# Altium PCB Tigershark 3D.PcbDoc (part 2 of 3)
Units mil, origin at the board's own origin, x right, y up, seen from the top; angles counter-clockwise.
Board outline 6000 x 4000 mil, 4 copper layers (Top Layer, Groun Plane, Power Plane, Bottom Layer); 251 components, 259 nets, 1002 pads, 1752 vias.
Unrouted connection lines stored in the file: 937.
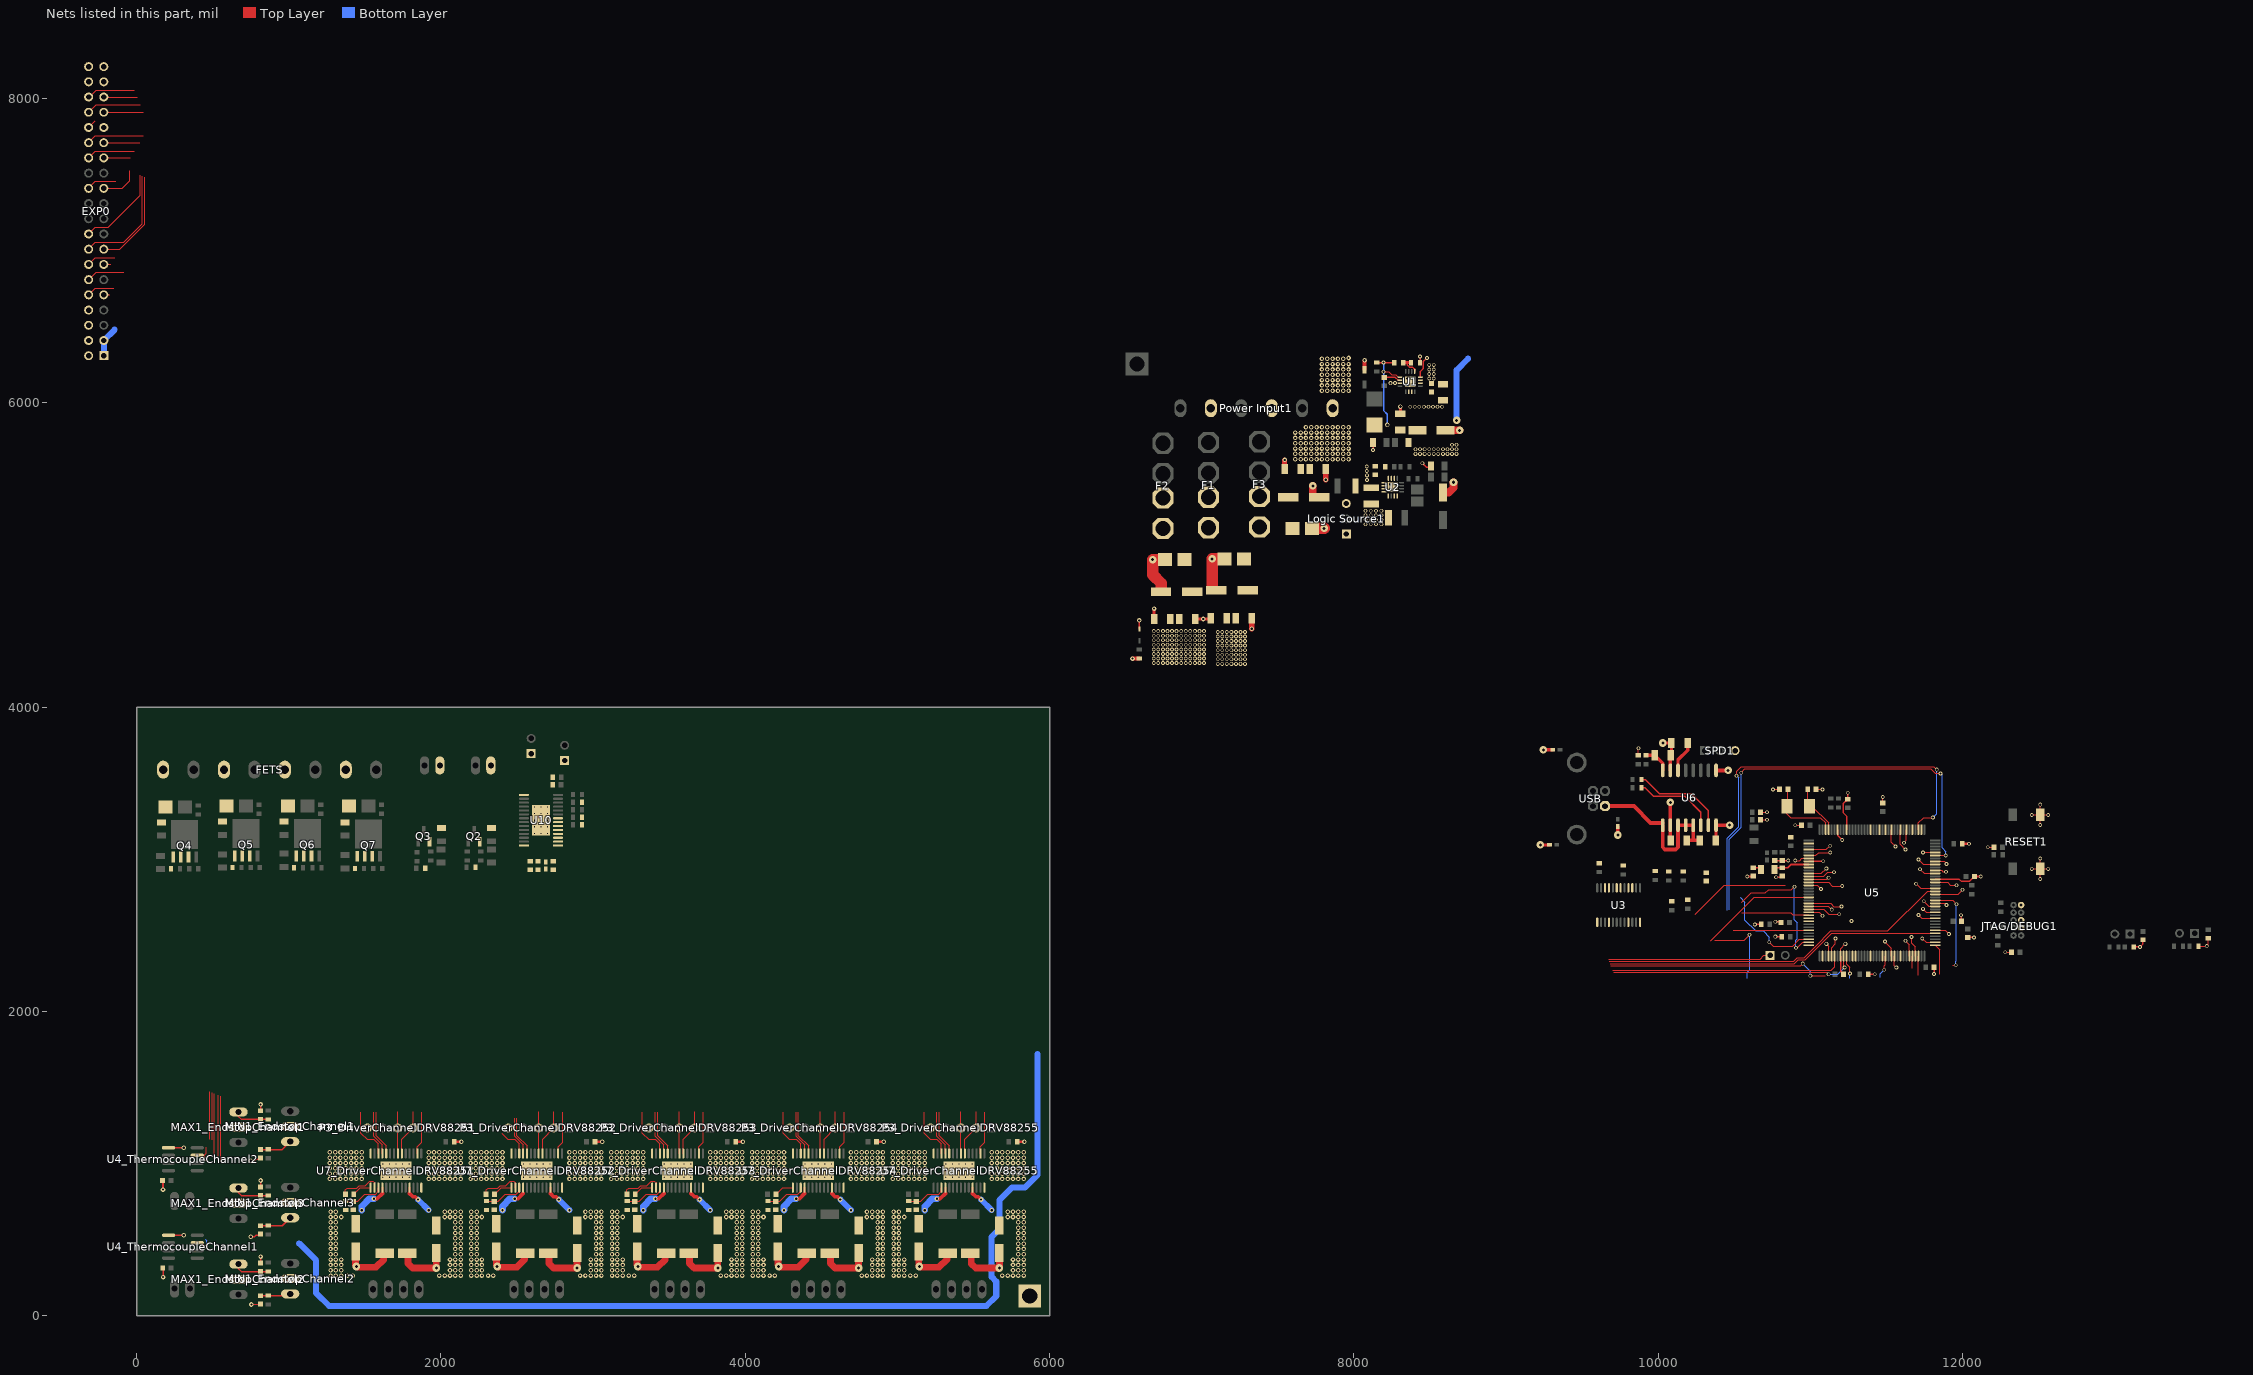
[diagram p4: the nets of this part, all layers, seen from the top]

## Via types
v1: diameter 30, hole 15, Top Layer to Bottom Layer, 1261 vias
v2: diameter 25, hole 15, Top Layer to Bottom Layer, 375 vias
v3: diameter 19.68, hole 7.87, Top Layer to Bottom Layer, 90 vias
v4: diameter 50, hole 20, Top Layer to Bottom Layer, 24 vias
v5: diameter 30, hole 20, Top Layer to Bottom Layer, 2 vias

## Nets (pads, with @x,y where several pads share a name; then routed paths per layer and width w, separated by ;. In a path a pad name is that pad's centre, name@x,y a point inside that pad or via, vN(x,y) a via of type N, cw(c..) or ccw(c..) an arc to the next point about the centre after c; other vN are vias at no path point) (continued)
+5VCC: "Logic Source1.3" C8.2 C9.1 EXP0.1 EXP0.3 L1.2 R7.2 R8.2 R9.1 U1.9 | length 7981
  Top Layer w8: v2(8195,6205) 8230,6205 8250,6185 8276.21,6185 8291.69,6169.53 U1.9@8303.07,6169.53
  Top Layer w10: R9.1@8145.47,6265 v2(8195,6265) R7.2@8270.47,6265
  Bottom Layer w10: v2(8195,6265) 8195,5950 8220,5925 v5(8220,5855)
  Bottom Layer w40: EXP0.1@-215,6310 EXP0.3@-215,6410 -144,6481 ; 1069,476 1180,365 1180,150 1265,65 5585,65 5650,130 5650,225 5619,256 5619,519 5670,570 5670,760 5755,845 5840,845 5920,925 5920,1720 ; v4@8675,5890 8675,6215 8750,6290
  other v2: 8405,5665 8435,5665 8465,5665 8495,5665 8525,5665 8555,5665 8585,5665 8615,5665 8645,5665 8675,5665 8405,5695 8435,5695 8465,5695 8495,5695 8525,5695 8555,5695 8585,5695 8615,5695 8645,5695 8675,5695 8645,5725 8675,5725
  other v4: 8675,5885
+12VCC1: C10.2 C11.2 C16.1 C18.2 C19.2 C66_DriverChannelDRV88251.1 C66_DriverChannelDRV88252.1 C66_DriverChannelDRV88253.1 C66_DriverChannelDRV88254.1 C66_DriverChannelDRV88255.1 C69_DriverChannelDRV88251.1 C69_DriverChannelDRV88252.1 C69_DriverChannelDRV88253.1 C69_DriverChannelDRV88254.1 C69_DriverChannelDRV88255.1 C70_DriverChannelDRV88251.1 C70_DriverChannelDRV88252.1 C70_DriverChannelDRV88253.1 C70_DriverChannelDRV88254.1 C70_DriverChannelDRV88255.1 D8.2 F3.2 R30_DriverChannelDRV88251.1 R30_DriverChannelDRV88252.1 R30_DriverChannelDRV88253.1 R30_DriverChannelDRV88254.1 R30_DriverChannelDRV88255.1 R31.2 U1.2 U1.3 U1.11 U7_DriverChannelDRV88251.4 U7_DriverChannelDRV88251.11 U7_DriverChannelDRV88252.4 U7_DriverChannelDRV88252.11 U7_DriverChannelDRV88253.4 U7_DriverChannelDRV88253.11 U7_DriverChannelDRV88254.4 U7_DriverChannelDRV88254.11 U7_DriverChannelDRV88255.4 U7_DriverChannelDRV88255.11 | length 2214.5
  Top Layer w14: 1615.43,804.43 U7_DriverChannelDRV88251.4@1615.43,842.8 ; 1794.57,804.43 U7_DriverChannelDRV88251.11@1794.57,842.8 ; 2540.43,804.43 U7_DriverChannelDRV88252.4@2540.43,842.8 ; 2719.57,804.43 U7_DriverChannelDRV88252.11@2719.57,842.8 ; 3465.43,804.43 U7_DriverChannelDRV88253.4@3465.43,842.8 ; 3644.57,804.43 U7_DriverChannelDRV88253.11@3644.57,842.8 ; 4390.43,804.43 U7_DriverChannelDRV88254.4@4390.43,842.8 ; 4569.57,804.43 U7_DriverChannelDRV88254.11@4569.57,842.8 ; 5315.43,804.43 U7_DriverChannelDRV88255.4@5315.43,842.8 ; 5494.57,804.43 U7_DriverChannelDRV88255.11@5494.57,842.8
  Top Layer w25: v1(1560,770) 1581,770 1615.43,804.43 ; 1794.57,804.43 1816,783 1832,783 v1(1850,765) ; v1(2485,770) 2506,770 2540.43,804.43 ; 2719.57,804.43 2741,783 2757,783 v1(2775,765) ; v1(3410,770) 3431,770 3465.43,804.43 ; 3644.57,804.43 3666,783 3682,783 v1(3700,765) ; v1(4335,770) 4356,770 4390.43,804.43 ; 4569.57,804.43 4591,783 4607,783 v1(4625,765) ; v1(5260,770) 5281,770 5315.43,804.43 ; 5494.57,804.43 5516,783 5532,783 v1(5550,765)
  Bottom Layer w39: v1(1850,765) v1(1920,695) ; v1(2775,765) v1(2845,695) ; v1(3700,765) v1(3770,695) ; v1(4625,765) v1(4695,695) ; v1(5550,765) v1(5620,695)
  Bottom Layer w45: v1(1480,695) 1480,720 1530,770 v1(1560,770) ; v1(2405,695) 2405,720 2455,770 v1(2485,770) ; v1(3330,695) 3330,720 3380,770 v1(3410,770) ; v1(4255,695) 4255,720 4305,770 v1(4335,770) ; v1(5180,695) 5180,720 5230,770 v1(5260,770)
  other v1: 1275,265 1310,265 1345,265 1385,265 1420,265 1990,265 2025,265 2060,265 2095,265 2130,265 2200,265 2235,265 2270,265 2310,265 2345,265 2915,265 2915,265 2950,265 2950,265 2985,265 2985,265 3020,265 3020,265 3055,265 3055,265 3125,265 3160,265 3195,265 3235,265 3270,265 3840,265 3875,265 3910,265 3945,265 3980,265 4050,265 4085,265 4120,265 4160,265 4195,265 4765,265 4800,265 4835,265 4870,265 4905,265 4975,265 5010,265 5045,265 5085,265 5120,265 5690,265 5725,265 5760,265 5795,265 5830,265 1275,300 1310,300 1345,300 2060,300 2095,300 2130,300 2200,300 2235,300 2235,300 2270,300 2985,300 2985,300 3020,300 3020,300 3055,300 3055,300 3125,300 3160,300 3195,300 3910,300 3945,300 3980,300 4050,300 4085,300 4120,300 4835,300 4870,300 4905,300 4975,300 5010,300 5045,300 5760,300 5795,300 5830,300 1275,335 1310,335 1345,335 2060,335 2095,335 2130,335 2200,335 2235,335 2270,335 2985,335 3020,335 3055,335 3055,335 3125,335 3160,335 3195,335 3910,335 3945,335 3980,335 4050,335 4085,335 4120,335 4835,335 4870,335 4905,335 4975,335 5010,335 5045,335 5760,335 5795,335 5830,335 1275,370 1310,370 1345,370 2060,370 2095,370 2130,370 2200,370 2200,370 2235,370 2235,370 2270,370 2985,370 2985,370 3020,370 3020,370 3055,370 3055,370 3125,370 3160,370 3195,370 3910,370 3945,370 3980,370 4050,370 4085,370 4120,370 4835,370 4870,370 4905,370 4975,370 5010,370 5045,370 5760,370 5795,370 5830,370 1275,405 1310,405 2095,405 2130,405 2200,405 2200,405 2200,405 2200,405 2200,405 2235,405 2235,405 3020,405 3020,405 3055,405 3055,405 3125,405 3125,405 3160,405 3945,405 3980,405 4050,405 4050,405 4085,405 4870,405 4905,405 4975,405 4975,405 5010,405 5795,405 5830,405 1275,440 1310,440 2095,440 2130,440 2200,440 2200,440 2200,440 2200,440 2200,440 2235,440 2235,440 3020,440 3020,440 3055,440 3055,440 3125,440 3125,440 3160,440 3945,440 3980,440 4050,440 4050,440 4085,440 4870,440 4905,440 4975,440 4975,440 5010,440 5795,440 5830,440 1275,475 1310,475 2095,475 2130,475 2200,475 2200,475 2200,475 2200,475 2200,475 2235,475 2235,475 3020,475 3020,475 3055,475 3055,475 3125,475 3125,475 3160,475 3945,475 3980,475 4050,475 4050,475 4085,475 4870,475 4905,475 4975,475 4975,475 5010,475 5795,475 5830,475 1275,510 1310,510 2095,510 2130,510 2200,510 2200,510 2200,510 2200,510 2200,510 2235,510 2235,510 3020,510 3020,510 3055,510 3055,510 3125,510 3125,510 3160,510 3945,510 3980,510 4050,510 4050,510 4085,510 4870,510 4905,510 4975,510 4975,510 5010,510 5795,510 5830,510 1275,545 1310,545 2095,545 2130,545 2200,545 2200,545 2200,545 2200,545 2200,545 2235,545 2235,545 3020,545 3020,545 3055,545 3055,545 3125,545 3125,545 3160,545 3945,545 3980,545 4050,545 4050,545 4085,545 4870,545 4905,545 4975,545 4975,545 5010,545 5795,545 5830,545 1275,580 1310,580 2095,580 2130,580 2200,580 2200,580 2200,580 2200,580 2200,580 2235,580 2235,580 3020,580 3020,580 3055,580 3055,580 3125,580 3125,580 3160,580 3945,580 3980,580 4050,580 4050,580 4085,580 4870,580 4905,580 4975,580 4975,580 5010,580 5795,580 5830,580 1275,615 1310,615 2095,615 2130,615 2200,615 2200,615 2235,615 2235,615 3020,615 3020,615 3055,615 3055,615 3125,615 3160,615 3945,615 3980,615 4050,615 4085,615 4870,615 4905,615 4975,615 5010,615 5795,615 5830,615 1275,650 1310,650 1345,650 2025,650 2060,650 2095,650 2130,650 2200,650 2200,650 2235,650 2235,650 2270,650 2270,650 2950,650 2950,650 2985,650 2985,650 3020,650 3020,650 3055,650 3055,650 3125,650 3160,650 3195,650 3875,650 3910,650 3945,650 3980,650 4050,650 4085,650 4120,650 4800,650 4835,650 4870,650 4905,650 4975,650 5010,650 5045,650 5725,650 5760,650 5795,650 5830,650 1275,685 1310,685 2025,685 2060,685 2095,685 2130,685 2200,685 2200,685 2235,685 2235,685 2950,685 2950,685 2985,685 2985,685 3020,685 3020,685 3055,685 3055,685 3125,685 3160,685 3875,685 3910,685 3945,685 3980,685 4050,685 4085,685 4800,685 4835,685 4870,685 4905,685 4975,685 5010,685 5725,685 5760,685 5795,685 5830,685 7615,5630 7650,5630 7685,5630 7720,5630 7755,5630 7790,5630 7825,5630 7860,5630 7895,5630 7930,5630 7965,5630 7615,5665 7650,5665 7685,5665 7720,5665 7755,5665 7790,5665 7825,5665 7860,5665 7895,5665 7930,5665 7965,5665 7615,5700 7650,5700 7685,5700 7720,5700 7755,5700 7790,5700 7825,5700 7860,5700 7895,5700 7930,5700 7965,5700 7615,5735 7650,5735 7685,5735 7720,5735 7755,5735 7790,5735 7825,5735 7860,5735 7895,5735 7930,5735 7965,5735 7615,5770 7650,5770 7685,5770 7720,5770 7755,5770 7790,5770 7825,5770 7860,5770 7895,5770 7930,5770 7965,5770 7615,5805 7650,5805 7685,5805 7720,5805 7755,5805 7790,5805 7825,5805 7860,5805 7895,5805 7930,5805 7965,5805 7685,5840 7720,5840 7755,5840 7790,5840 7825,5840 7860,5840 7895,5840 7930,5840 7965,5840 7790,6080 7825,6080 7860,6080 7895,6080 7930,6080 7965,6080 7790,6115 7825,6115 7860,6115 7895,6115 7930,6115 7965,6115 7790,6150 7825,6150 7860,6150 7895,6150 7930,6150 7965,6150 7790,6185 7825,6185 7860,6185 7895,6185 7930,6185 7965,6185 7790,6220 7825,6220 7860,6220 7895,6220 7930,6220 7965,6220 7790,6255 7825,6255 7860,6255 7895,6255 7930,6255 7965,6255 7790,6290 7825,6290 7860,6290 7895,6290 7930,6290 7965,6295
  other v2: 8240,6130 8270,6130.16 8495,6160 8525,6160 8495,6190 8525,6190 8495,6220 8525,6220 8495,6250 8525,6250
+12VCC2: C3.1 C5.2 C6.2 D4.2 D12.2 D15.2 D17.2 D19.2 F2.2 FAN-1.1 FAN-2.1 FETS.1 FETS.3 FETS.5 FETS.7 R1.2 R13.1 R47.1 R56.2 R60.2 R64.2 R68.2 U10.1 | length 45.2
  Top Layer w8: R1.2@6589.53,4320 R1.2@6590,4320.47
  Top Layer w25: v1(6545,4320) R1.2@6589.53,4320
  other v2: 6685,4290 6715,4290 6745,4290 6775,4290 6805,4290 6835,4290 6865,4290 6895,4290 6925,4290 6955,4290 6985,4290 7015,4290 6685,4320 6715,4320 6745,4320 6775,4320 6805,4320 6835,4320 6865,4320 6895,4320 6925,4320 6955,4320 6985,4320 7015,4320 6685,4350 6715,4350 6745,4350 6775,4350 6805,4350 6835,4350 6865,4350 6895,4350 6925,4350 6955,4350 6985,4350 7015,4350 6685,4380 6715,4380 6745,4380 6775,4380 6805,4380 6835,4380 6865,4380 6895,4380 6925,4380 6955,4380 6985,4380 7015,4380 6685,4410 6715,4410 6745,4410 6775,4410 6805,4410 6835,4410 6865,4410 6895,4410 6925,4410 6955,4410 6985,4410 7015,4410 6685,4440 6715,4440 6745,4440 6775,4440 6805,4440 6835,4440 6865,4440 6895,4440 6925,4440 6955,4440 6985,4440 7015,4440 6685,4470 6715,4470 6745,4470 6775,4470 6805,4470 6835,4470 6865,4470 6895,4470 6925,4470 6955,4470 6985,4470 7015,4470 6685,4500 6715,4500 6745,4500 6775,4500 6805,4500 6835,4500 6865,4500 6895,4500 6925,4500 6955,4500 6985,4500 7015,4500
+12VCC3: C12.1 C14.2 C15.2 D6.2 F1.2
  other v2: 7105,4285 7135,4285 7165,4285 7195,4285 7225,4285 7255,4285 7285,4285 7105,4315 7135,4315 7165,4315 7195,4315 7225,4315 7255,4315 7285,4315 7105,4345 7135,4345 7165,4345 7195,4345 7225,4345 7255,4345 7285,4345 7105,4375 7135,4375 7165,4375 7195,4375 7225,4375 7255,4375 7285,4375 7105,4405 7135,4405 7165,4405 7195,4405 7225,4405 7255,4405 7285,4405 7105,4435 7135,4435 7165,4435 7195,4435 7225,4435 7255,4435 7285,4435 7105,4465 7135,4465 7165,4465 7195,4465 7225,4465 7255,4465 7285,4465 7105,4495 7135,4495 7165,4495 7195,4495 7225,4495 7255,4495 7285,4495
ADC_TRIGGER: U5.36
ATSAM_SS: U5.64
AVDD3.3: C64.2 FB9.1 | length 56.9
  Top Layer w12: C64.2@10625,2945.12 10664.13,2945.12 FB9.1@10676.69,2932.56
AVREF: C65.2 FB9.2 U5.9 | length 240.6
  Top Layer w12: FB9.2@10763.31,2932.56 10775.87,2945.12 C65.2@10815,2945.12 10852.56,2945.12 10874.45,2967.01 U5.9@10989.65,2967.01
BED_PWM: R44.2 U10.17
BST: C7.2 U1.10 | length 110.4
  Top Layer w10: C7.2@8200,6167.56 8271.7,6167.56 8289.41,6149.84 U1.10@8303.07,6149.84
DIR: P3_DriverChannelDRV88251.2 P3_DriverChannelDRV88252.2 P3_DriverChannelDRV88253.2 P3_DriverChannelDRV88254.2 P3_DriverChannelDRV88255.2 U7_DriverChannelDRV88251.20 U7_DriverChannelDRV88252.20 U7_DriverChannelDRV88253.20 U7_DriverChannelDRV88254.20 U7_DriverChannelDRV88255.20 | length 1530
  Top Layer w8: U7_DriverChannelDRV88251.20@1743.39,1067.2 1743.39,1160.89 P3_DriverChannelDRV88251.2@1817.5,1235 1817.5,1342.5 ; U7_DriverChannelDRV88252.20@2668.39,1067.2 2668.39,1160.89 P3_DriverChannelDRV88252.2@2742.5,1235 2742.5,1342.5 ; U7_DriverChannelDRV88253.20@3593.39,1067.2 3593.39,1160.89 P3_DriverChannelDRV88253.2@3667.5,1235 3667.5,1342.5 ; U7_DriverChannelDRV88254.20@4518.39,1067.2 4518.39,1160.89 P3_DriverChannelDRV88254.2@4592.5,1235 4592.5,1342.5 ; U7_DriverChannelDRV88255.20@5443.39,1067.2 5443.39,1160.89 P3_DriverChannelDRV88255.2@5517.5,1235 5517.5,1342.5
DIR1: U5.113
DIR2: U5.110
DIR3: U5.101 | length 81.6
  Top Layer w8: U5.101@11820.35,2986.69 11878.31,2986.69 v2(11895,2970)
DIR4: U5.98 | length 74.5
  Top Layer w8: U5.98@11820.35,2927.64 11862.36,2927.64 11871.18,2918.82 v2(11891.18,2918.82)
DIR5: U5.92 | length 138
  Top Layer w8: v2(11695,2840) 11725.47,2809.53 U5.92@11820.35,2809.53
DIR_EXP1: EXP0.27 U5.59 | length 327.6
  Top Layer w8: EXP0.27@-215,7610 -40.6,7610 ; v2(11485,2275) 11485,2300 11493.58,2308.58 U5.59@11493.58,2364.65
  Bottom Layer w8: 11458.94,2225.76 11458.94,2248.94 v2(11485,2275)
DIR_EXP2: EXP0.28 U5.26 | length 765.2
  Top Layer w8: EXP0.28@-315,7610 -270,7655 -15.4,7655 ; 10550,2650 10870,2650 10885,2635 10987.01,2635 U5.26@10989.65,2632.36
DM_N: R18.1 U6.6 | length 541.9
  Top Layer w10: R18.1@9889.53,3470 9915,3470 9971,3414 10176,3414 10280,3310 U6.6@10280,3224.88
DP_P: R20.1 U6.7 | length 620.5
  Top Layer w10: R20.1@9889.53,3525 9915,3525 10010,3430 10220,3430 10330,3320 U6.7@10330,3224.88
DRV_RESET: U7_DriverChannelDRV88251.16 U7_DriverChannelDRV88252.16 U7_DriverChannelDRV88253.16 U7_DriverChannelDRV88254.16 U7_DriverChannelDRV88255.16 | length 1424.6
  Top Layer w8: U7_DriverChannelDRV88251.16@1845.75,1067.2 1845.75,1110.75 1875,1140 1875,1340 ; U7_DriverChannelDRV88252.16@2770.75,1067.2 2770.75,1110.75 2800,1140 2800,1340 ; U7_DriverChannelDRV88253.16@3695.75,1067.2 3695.75,1110.75 3725,1140 3725,1340 ; U7_DriverChannelDRV88254.16@4620.75,1067.2 4620.75,1110.75 4650,1140 4650,1340 ; U7_DriverChannelDRV88255.16@5545.75,1067.2 5545.75,1110.75 5575,1140 5575,1340
DRV_RESET1: U5.82 | length 119.6
  Top Layer w8: v2(11710,2635) 11732.32,2612.68 U5.82@11820.35,2612.68
DRV_RESET2: U5.86 | length 89.3
  Top Layer w8: v2(11745,2725) 11778.58,2691.42 U5.86@11820.35,2691.42
DRV_RESET3: U5.90 | length 192
  Top Layer w8: U5.90@11820.35,2770.16 11970.16,2770.16 v2(12000,2800)
DRV_RESET4: U5.94 | length 147.5
  Top Layer w8: U5.94@11820.35,2848.9 11901.1,2848.9 11920,2830 v2(11960,2830)
DRV_RESET5: U5.97 | length 111.6
  Top Layer w8: v2(11720,2935) 11747.05,2907.95 U5.97@11820.35,2907.95
DRV_RESET_EXP1: EXP0.35 U5.88 | length 792.4
  Top Layer w8: EXP0.35@-215,8010 5,8010 ; U5.88@11820.35,2730.79 11934.21,2730.79 v2(11960,2705) ; 11935,2305 v2(11955,2305)
  Bottom Layer w8: v2(11955,2305) 11955,2330 11960,2335 v2(11960,2705)
DRV_RESET_EXP2: EXP0.36 U5.2 | length 989.2
  Top Layer w8: EXP0.36@-315,8010 -310,8010 -265,8055 -15,8055 ; 10243.18,2640 10433.18,2830 10835,2830
EN: P3_DriverChannelDRV88251.3 P3_DriverChannelDRV88252.3 P3_DriverChannelDRV88253.3 P3_DriverChannelDRV88254.3 P3_DriverChannelDRV88255.3 U7_DriverChannelDRV88251.21 U7_DriverChannelDRV88252.21 U7_DriverChannelDRV88253.21 U7_DriverChannelDRV88254.21 U7_DriverChannelDRV88255.21 | length 1376.5
  Top Layer w8: P3_DriverChannelDRV88251.3@1717.5,1235 1717.5,1342.5 ; U7_DriverChannelDRV88251.21@1717.8,1067.2 P3_DriverChannelDRV88251.3@1717.8,1235 ; P3_DriverChannelDRV88252.3@2642.5,1235 2642.5,1342.5 ; U7_DriverChannelDRV88252.21@2642.8,1067.2 P3_DriverChannelDRV88252.3@2642.8,1235 ; P3_DriverChannelDRV88253.3@3567.5,1235 3567.5,1342.5 ; U7_DriverChannelDRV88253.21@3567.8,1067.2 P3_DriverChannelDRV88253.3@3567.8,1235 ; P3_DriverChannelDRV88254.3@4492.5,1235 4492.5,1342.5 ; U7_DriverChannelDRV88254.21@4492.8,1067.2 P3_DriverChannelDRV88254.3@4492.8,1235 ; P3_DriverChannelDRV88255.3@5417.5,1235 5417.5,1342.5 ; U7_DriverChannelDRV88255.21@5417.8,1067.2 P3_DriverChannelDRV88255.3@5417.8,1235
EN1: U5.12 | length 128.6
  Top Layer w8: U5.12@10989.65,2907.95 11072.95,2907.95 v2(11105,2940)
EN2: U5.13 | length 176.4
  Top Layer w8: U5.13@10989.65,2888.27 11088.27,2888.27 11115,2915 v2(11155,2915)
EN3: U5.14 | length 135.1
  Top Layer w8: U5.14@10989.65,2868.58 11108.58,2868.58 v2(11120,2880)
EN4: U5.15 | length 230.3
  Top Layer w8: U5.15@10989.65,2848.9 11121.1,2848.9 11145,2825 v2(11210,2825)
EN5: U5.16 | length 90.4
  Top Layer w8: U5.16@10989.65,2829.21 11045.79,2829.21 v2(11070,2805)
EN_EXP1: EXP0.23 U5.46 | length 945.3
  Top Layer w8: EXP0.23@-215,7410 -95,7410 -45,7460 -45,7525 ; 10370,2470 10565,2470 v2(10600,2505) ; U5.46@11237.68,2364.65 11237.68,2312.32 11260,2290 v2(11260,2250)
  Bottom Layer w8: 10585,2220 10585,2260 10600,2275 v2(10600,2505) ; 11260,2220 v2(11260,2250)
EN_EXP2: EXP0.24 U5.20 | length 962.9
  Top Layer w8: EXP0.24@-315,7410 -270,7455 -135,7455 ; 10344,2464 10630.47,2750.47 U5.20@10989.65,2750.47
ERASE: U5.87 | length 79.2
  Top Layer w8: U5.87@11820.35,2711.1 11883.9,2711.1 v2(11895,2700)
EXP_CS: EXP0.9 U5.45 | length 2087
  Top Layer w8: EXP0.9@-215,6710 -175,6710 ; 552,1017 552,1444.01 ; 9706.99,2259 11106,2259 v2(11120,2245) ; U5.45@11217.99,2364.65 11217.99,2297.01 v2(11225,2290)
  Bottom Layer w8: v2(11120,2245) 11180,2245 v2(11225,2290)
EXP_INTERRUP1: EXP0.16 U5.103 | length 3620.7
  Top Layer w8: EXP0.16@-315,7010 -270,7055 -84.4,7055 39,7178.4 39,7489.6 ; v2(10545,3570) 10570,3595 11790,3595 11820,3565 v2(11855,3565) ; U5.103@11820.35,3026.06 v2(11888.94,3026.06)
  Bottom Layer w8: 10467.5,2670.68 10467.5,3132.7 10545,3210.2 v2(10545,3570) ; v2(11855,3565) 11865,3555 11865,3075 11888.94,3051.06 v2(11888.94,3026.06)
EXP_INTERRUP2: EXP0.18 U5.111 | length 3344.2
  Top Layer w8: EXP0.18@-315,7110 -270,7155 -185,7155 25,7365 25,7495.4 ; v2(10515,3550) 10515,3580 10545,3610 11810,3610 v2(11830,3590) ; U5.111@11710.12,3195.35 11710.12,3240.12 11745,3275 v2(11805,3275)
  Bottom Layer w8: 10453.5,2664.88 10453.5,3138.5 10530,3215 10530,3535 v2(10515,3550) ; v2(11805,3275) 11830,3300 v2(11830,3590)
EXP_SYNC: U5.100 | length 124
  Top Layer w8: v2(11710,3000) 11742.99,2967.01 U5.100@11820.35,2967.01
FB: R7.1 R10.2 U1.5 | length 134.9
  Top Layer w10: 8352.26,6265 8352.26,6247.74 8365,6235 8385.11,6235 8399.53,6220.59 U1.5@8399.53,6206.93
  Top Layer w20: R7.1@8329.53,6265 R10.2@8375,6265
FET_CS: R54.1 U5.49
FET_PWM1: R39.2 U10.22
FET_PWM2: R40.2 U10.21
FET_PWM3: R41.2 U10.20
FET_PWM4: R42.2 U10.19
FET_PWM5: R43.2 U10.18
FET_RESET: "FET MCU RESET.1" U5.38
GND: "Power Input1.2" "Power Input1.4" "Power Input1.6" C1_EndstopChannel1.2 C1_EndstopChannel2.2 C1_EndstopChannel3.2 C2_EndstopChannel1.2 C2_EndstopChannel2.2 C2_EndstopChannel3.2 C3.2 C4.2 C5.1 C6.1 C8.1 C9.2 C10.1 C11.1 C12.2 C13.1 C14.1 C15.1 C16.2 C17.2 C18.1 C19.1 C20.1 C21.1 C22.2 C23.2 C24.1 C25.1 C26.2 C31_ThermocoupleChannel1.1 C31_ThermocoupleChannel2.1 C32.1 C33.1 C36.1 C37.1 C38.1 C39.1 C40.1 C41.1 C42.1 C43.1 C44.1 C45.1 C46.1 C47.1 C48.1 C49.1 C50.1 C51.1 C54.1 C55.1 C56.1 C57.1 C60.1 C61.1 C62.1 C63.1 C64.1 C65.1 C69_DriverChannelDRV88251.2 C69_DriverChannelDRV88252.2 C69_DriverChannelDRV88253.2 C69_DriverChannelDRV88254.2 C69_DriverChannelDRV88255.2 C70_DriverChannelDRV88251.2 C70_DriverChannelDRV88252.2 C70_DriverChannelDRV88253.2 C70_DriverChannelDRV88254.2 C70_DriverChannelDRV88255.2 C71_DriverChannelDRV88251.1 C71_DriverChannelDRV88252.1 C71_DriverChannelDRV88253.1 C71_DriverChannelDRV88254.1 C71_DriverChannelDRV88255.1 D1.1 D4.1 D5.1 D6.1 D7.1 D8.1 D9.1 EXP0.2 EXP0.4 EXP0.6 EXP0.8 JTAG/DEBUG1.3 JTAG/DEBUG1.5 JTAG/DEBUG1.9 MAX1_EndstopChannel1.2 MAX1_EndstopChannel2.2 MAX1_EndstopChannel3.2 MIN1_EndstopChannel1.2 MIN1_EndstopChannel2.2 MIN1_EndstopChannel3.2 P3_DriverChannelDRV88251.5 P3_DriverChannelDRV88252.5 P3_DriverChannelDRV88253.5 P3_DriverChannelDRV88254.5 P3_DriverChannelDRV88255.5 pad.@5870,130 Q2.2 Q3.2 Q4.1 Q4.2 Q4.3 Q5.1 Q5.2 Q5.3 Q6.1 Q6.2 Q6.3 Q7.1 Q7.2 Q7.3 R10.1 R15.2 R28.1 R29.2 R32_DriverChannelDRV88251.1 R32_DriverChannelDRV88252.1 R32_DriverChannelDRV88253.1 R32_DriverChannelDRV88254.1 R32_DriverChannelDRV88255.1 R33_DriverChannelDRV88251.1 R33_DriverChannelDRV88252.1 R33_DriverChannelDRV88253.1 R33_DriverChannelDRV88254.1 R33_DriverChannelDRV88255.1 R38.1 R46.2 R55.2 R59.2 R63.2 R67.2 R71.2 RESET1.2 SPD1.3 U1.4 U1.14 U1.15 U1.17 U2.6 U2.7 U2.8 U2.15 U2.16 U2.17 U3.3 U3.4 U3.9 U3.10 U3.13 U3.16 U3.21 U3.24 U4_ThermocoupleChannel1.1 U4_ThermocoupleChannel2.1 U5.8 U5.44 U5.61 U5.95 U5.104 U5.115 U5.135 U5.138 U6.9 U6.15 U7_DriverChannelDRV88251.14 U7_DriverChannelDRV88251.28 U7_DriverChannelDRV88251.29 U7_DriverChannelDRV88252.14 U7_DriverChannelDRV88252.28 U7_DriverChannelDRV88252.29 U7_DriverChannelDRV88253.14 U7_DriverChannelDRV88253.28 U7_DriverChannelDRV88253.29 U7_DriverChannelDRV88254.14 U7_DriverChannelDRV88254.28 U7_DriverChannelDRV88254.29 U7_DriverChannelDRV88255.14 U7_DriverChannelDRV88255.28 U7_DriverChannelDRV88255.29 U10.16 U10.29 | length 9335.9
  Top Layer w8: v1(755,75) 812.09,75 C1_EndstopChannel2.2@815,77.91 ; R15.2@9870,3684.53 v2(9870,3730) ; v4@10459.88,3585.12 v4(10460,3585) ; C32.1@10672.56,3260 v2(10715,3260) ; C33.1@10672.56,3310 v2(10715,3310) ; v2(10755,3460) C44.1@10797.44,3460 ; v2(10900,3225) C51.1@10942.44,3225 ; C43.1@11037.56,3460 v2(11080,3460) ; U5.44@11198.31,2364.65 11198.31,2413.31 v2(11230,2445) ; C42.1@11475,3370.12 v2(11475,3410) ; v2(11490,2460) 11532.95,2417.05 U5.61@11532.95,2364.65 ; v2(11615,3110) 11631.38,3126.38 U5.115@11631.38,3195.35 ; v2@11740,3045 v2(11740.75,3045.75) U5.104@11820.35,3045.75 ; v2(12165,3080) C63.1@12207.44,3080 ; v2(12280,2390) C62.1@12322.44,2390 ; v2(12455,2937.83) RESET1.2@12510.55,2937.83 ; v2(12455,3292.17) RESET1.2@12510.55,3292.17 ; v2(12510.55,2871.22) RESET1.2@12510.55,2937.83 ; v2(12510.55,3005.67) RESET1.2@12510.55,2937.83 ; v2(12510.55,3225.55) RESET1.2@12510.55,3292.17 ; v2(12510.55,3360) RESET1.2@12510.55,3292.17 ; v2(12562.83,2937.83) RESET1.2@12510.55,2937.83 ; v2(12562.83,3292.17) RESET1.2@12510.55,3292.17 ; R29.2@13549.53,2430 v2(13605,2430) 13615,2440 C60.1@13615,2482.44
  Top Layer w10: v1(173.98,830) C31_ThermocoupleChannel2.1@173.98,887.44 ; v1(174.49,255) C31_ThermocoupleChannel1.1@174.49,312.44 ; U4_ThermocoupleChannel2.1@210,1105 v1(309.49,1105) ; U4_ThermocoupleChannel1.1@210.51,530 v1(310,530) ; v1(750,520) 775,520 785,530 815,530 C1_EndstopChannel3.2@815,537.91 ; v1(750,1020) 775,1020 785,1030 815,1030 C1_EndstopChannel1.2@815,1037.91 ; C2_EndstopChannel2.2@815,347.56 v1(815,390) ; C2_EndstopChannel3.2@815,847.56 v1(815,890) ; C2_EndstopChannel1.2@815,1347.56 v1(815,1390) ; v2(8125,5690) 8126.61,5691.61 D7.1@8126.61,5740 ; R10.1@8435,6265.47 v2(8435,6305) ; U1.4@8436.93,6169.53 8436.93,6206.93 8455,6225 8455,6270 v2(8480,6295) ; v2(8449.96,5603.58) 8474.96,5578.58 8501.81,5578.58 D9.1@8508.31,5585.08 ; C57.1@10080,3681.85 C57.1@10083.15,3685 C57.1@10086.85,3688.7 ; v2(10585,2887.56) 10622.56,2887.56 C64.1@10625,2890 ; v2(10635,2572.56) C45.1@10677.44,2572.56 ; C54.1@10765,2992.44 10765.12,2992.56 v2(10855,2992.56) ; v2(10770,2492.56) C39.1@10812.44,2492.56 ; v2(10770,2590) C40.1@10807.44,2590 ; v2(10775,2882.56) 10807.56,2882.56 C65.1@10815,2890 ; U5.8@10989.65,2986.69 11084.13,2986.69 v2(11085,2987.56) ; U5.138@11178.62,3195.35 11178.62,3158.94 v2(11210,3127.56) ; U5.44@11198.31,2364.65 11198.31,2264.25 C46.1@11217.56,2245 ; U5.135@11237.68,3195.35 11237.68,3284.88 11215,3307.56 11215,3365.12 C50.1@11245,3395.12 v2(11245,3437.56) ; C41.1@11380,2245 v2(11422.44,2245) ; v2(11812.56,2247.56) C47.1@11812.56,2290 ; U5.95@11820.35,2868.58 11978.98,2868.58 11990,2857.56 12047.56,2857.56 C49.1@12077.56,2887.56 v2(12120,2887.56) ; v2(11990,2632.56) 11990,2595.12 C38.1@11992.56,2592.56 ; C48.1@12035,2487.44 v2(12075,2487.44) ; R28.1@13125,2424.53 v2(13165.47,2424.53) 13185.47,2444.53 C61.1@13185.47,2471.97
  Top Layer w12: D1.1@6590,4514.37 v1(6590,4570.47)
  Top Layer w15: C71_DriverChannelDRV88251.1@2087.56,1145 v1(2135.12,1145) ; C71_DriverChannelDRV88252.1@3012.56,1145 v1(3060.12,1145) ; C71_DriverChannelDRV88253.1@3937.56,1145 v1(3985.12,1145) ; C71_DriverChannelDRV88254.1@4862.56,1145 v1(4910.12,1145) ; C71_DriverChannelDRV88255.1@5787.56,1145 v1(5835.12,1145) ; C37.1@11997.56,3102.56 v2(12042.44,3102.56)
  Top Layer w20: C8.1@8305,5928.15 v5(8305,5975)
  Top Layer w22: C5.1@6686.85,4580 v1(6686.85,4648.15) ; C6.1@6958.15,4580 C14.1@7053.19,4580 ; v4(10030,3765) C56.1@10086.85,3765 C57.1@10086.85,3688.7 ; U6.15@10080,3585.12 C57.1@10080,3681.85
  Top Layer w25: D5.1@8070,6218.23 v1(8070,6280) ; U6.9@10380,3585.12 v4@10459.88,3585.12
  Top Layer w35: v1(7329.49,4515) C15.1@7329.49,4585 ; C19.1@7544.49,5565 v1@7544.49,5624.49 ; v1(7815.79,5495.79) C18.1@7815.79,5565
  Top Layer w45: C69_DriverChannelDRV88251.2@1440,414.45 1440,335 1455,320 1575,320 1625,370 R33_DriverChannelDRV88251.1@1625,412.05 ; R32_DriverChannelDRV88251.1@1785,412.05 1785,345 1815,315 v4(1970,315) C70_DriverChannelDRV88251.2@1970,414.45 ; C69_DriverChannelDRV88252.2@2365,414.45 2365,335 2380,320 2500,320 2550,370 R33_DriverChannelDRV88252.1@2550,412.05 ; R32_DriverChannelDRV88252.1@2710,412.05 2710,345 2740,315 v4(2895,315) C70_DriverChannelDRV88252.2@2895,414.45 ; C69_DriverChannelDRV88253.2@3290,414.45 3290,335 3305,320 3425,320 3475,370 R33_DriverChannelDRV88253.1@3475,412.05 ; R32_DriverChannelDRV88253.1@3635,412.05 3635,345 3665,315 v4(3820,315) C70_DriverChannelDRV88253.2@3820,414.45 ; C69_DriverChannelDRV88254.2@4215,414.45 4215,335 4230,320 4350,320 4400,370 R33_DriverChannelDRV88254.1@4400,412.05 ; R32_DriverChannelDRV88254.1@4560,412.05 4560,345 4590,315 v4(4745,315) C70_DriverChannelDRV88254.2@4745,414.45 ; C69_DriverChannelDRV88255.2@5140,414.45 5140,335 5155,320 5275,320 5325,370 R33_DriverChannelDRV88255.1@5325,412.05 ; R32_DriverChannelDRV88255.1@5485,412.05 5485,345 5515,315 v4(5670,315) C70_DriverChannelDRV88255.2@5670,414.45
  Top Layer w50: v4(7730,5455) 7730,5400 7750,5380 C16.2@7772.36,5380 ; C23.2@8585.69,5411.13 8622.51,5411.13 8654.96,5443.58 v4(8654.96,5478.58) ; C9.2@8600.55,5820 v4(8695,5820)
  Top Layer w75: C3.2@6735,4775 6735,4813.5 6677.64,4870.86 v4(6677.64,4970) D4.1@6758.66,4970 ; 7068.98,4797.64 v4(7068.98,4975) D6.1@7150,4975 ; D8.1@7723.98,5175 v4(7805,5175)
  other v1: 1270,900 1305,900 1340,900 1375,900 1410,900 1445,900 1480,900 1920,900 1955,900 1990,900 2025,900 2060,900 2095,900 2130,900 2195,900 2230,900 2265,900 2300,900 2335,900 2370,900 2405,900 2845,900 2880,900 2915,900 2950,900 2985,900 3020,900 3055,900 3120,900 3155,900 3190,900 3225,900 3260,900 3295,900 3330,900 3770,900 3805,900 3840,900 3875,900 3910,900 3945,900 3980,900 4045,900 4080,900 4115,900 4150,900 4185,900 4220,900 4255,900 4695,900 4730,900 4765,900 4800,900 4835,900 4870,900 4905,900 4970,900 5005,900 5040,900 5075,900 5110,900 5145,900 5180,900 5620,900 5655,900 5690,900 5725,900 5760,900 5795,900 5830,900 1270,935 1305,935 1340,935 1375,935 1410,935 1445,935 1480,935 1920,935 1955,935 1990,935 2025,935 2060,935 2095,935 2130,935 2195,935 2230,935 2265,935 2300,935 2335,935 2370,935 2405,935 2845,935 2880,935 2915,935 2950,935 2985,935 3020,935 3055,935 3120,935 3155,935 3190,935 3225,935 3260,935 3295,935 3330,935 3770,935 3805,935 3840,935 3875,935 3910,935 3945,935 3980,935 4045,935 4080,935 4115,935 4150,935 4185,935 4220,935 4255,935 4695,935 4730,935 4765,935 4800,935 4835,935 4870,935 4905,935 4970,935 5005,935 5040,935 5075,935 5110,935 5145,935 5180,935 5620,935 5655,935 5690,935 5725,935 5760,935 5795,935 5830,935 1270,970 1305,970 1340,970 1375,970 1410,970 1445,970 1480,970 1920,970 1955,970 1990,970 2025,970 2060,970 2095,970 2130,970 2195,970 2230,970 2265,970 2300,970 2335,970 2370,970 2405,970 2845,970 2880,970 2915,970 2950,970 2985,970 3020,970 3055,970 3120,970 3155,970 3190,970 3225,970 3260,970 3295,970 3330,970 3770,970 3805,970 3840,970 3875,970 3910,970 3945,970 3980,970 4045,970 4080,970 4115,970 4150,970 4185,970 4220,970 4255,970 4695,970 4730,970 4765,970 4800,970 4835,970 4870,970 4905,970 4970,970 5005,970 5040,970 5075,970 5110,970 5145,970 5180,970 5620,970 5655,970 5690,970 5725,970 5760,970 5795,970 5830,970 1270,1005 1305,1005 1340,1005 1375,1005 1410,1005 1445,1005 1480,1005 1920,1005 1955,1005 1990,1005 2025,1005 2060,1005 2095,1005 2130,1005 2195,1005 2230,1005 2265,1005 2300,1005 2335,1005 2370,1005 2405,1005 2845,1005 2880,1005 2915,1005 2950,1005 2985,1005 3020,1005 3055,1005 3120,1005 3155,1005 3190,1005 3225,1005 3260,1005 3295,1005 3330,1005 3770,1005 3805,1005 3840,1005 3875,1005 3910,1005 3945,1005 3980,1005 4045,1005 4080,1005 4115,1005 4150,1005 4185,1005 4220,1005 4255,1005 4695,1005 4730,1005 4765,1005 4800,1005 4835,1005 4870,1005 4905,1005 4970,1005 5005,1005 5040,1005 5075,1005 5110,1005 5145,1005 5180,1005 5620,1005 5655,1005 5690,1005 5725,1005 5760,1005 5795,1005 5830,1005 1270,1040 1305,1040 1340,1040 1375,1040 1410,1040 1445,1040 1480,1040 1920,1040 1955,1040 1990,1040 2025,1040 2060,1040 2095,1040 2130,1040 2195,1040 2230,1040 2265,1040 2300,1040 2335,1040 2370,1040 2405,1040 2845,1040 2880,1040 2915,1040 2950,1040 2985,1040 3020,1040 3055,1040 3120,1040 3155,1040 3190,1040 3225,1040 3260,1040 3295,1040 3330,1040 3770,1040 3805,1040 3840,1040 3875,1040 3910,1040 3945,1040 3980,1040 4045,1040 4080,1040 4115,1040 4150,1040 4185,1040 4220,1040 4255,1040 4695,1040 4730,1040 4765,1040 4800,1040 4835,1040 4870,1040 4905,1040 4970,1040 5005,1040 5040,1040 5075,1040 5110,1040 5145,1040 5180,1040 5620,1040 5655,1040 5690,1040 5725,1040 5760,1040 5795,1040 5830,1040 1270,1075 1305,1075 1340,1075 1375,1075 1410,1075 1445,1075 1480,1075 1920,1075 1955,1075 1990,1075 2025,1075 2060,1075 2095,1075 2130,1075 2195,1075 2230,1075 2265,1075 2300,1075 2335,1075 2370,1075 2405,1075 2845,1075 2880,1075 2915,1075 2950,1075 2985,1075 3020,1075 3055,1075 3120,1075 3155,1075 3190,1075 3225,1075 3260,1075 3295,1075 3330,1075 3770,1075 3805,1075 3840,1075 3875,1075 3910,1075 3945,1075 3980,1075 4045,1075 4080,1075 4115,1075 4150,1075 4185,1075 4220,1075 4255,1075 4695,1075 4730,1075 4765,1075 4800,1075 4835,1075 4870,1075 4905,1075 4970,1075 5005,1075 5040,1075 5075,1075 5110,1075 5145,1075 5180,1075 5620,1075 5655,1075 5690,1075 5725,1075 5760,1075 5795,1075 5830,1075 7010,4580 7545,5625
  other v2: 8075.69,5202.58 8110.69,5202.58 8145.69,5202.58 8180.69,5202.58 8075.69,5232.58 8110.69,5232.58 8145.69,5232.58 8180.69,5232.58 8075.69,5261.58 8110.69,5261.58 8145.69,5261.58 8180.69,5261.58 8075.69,5291.58 8110.69,5291.58 8145.69,5291.58 8180.69,5291.58 8274.69,5427.58 8237.69,5428.58 8236.69,5465.58 8274.69,5465.58 8085.69,5493.58 8085.69,5523.58 8084.69,5552.58 8084.69,5582.58 8370,5975 8400,5975 8430,5975 8460,5975 8490,5975 8520,5975 8550,5975 8580,5975 8350,6120 8390,6120 8350,6160 8390,6160
  other v3: 1618.39,911.69 1661.69,911.69 1705,911.69 1748.31,911.69 1791.61,911.69 2543.39,911.69 2586.69,911.69 2630,911.69 2673.31,911.69 2716.61,911.69 3468.39,911.69 3511.69,911.69 3555,911.69 3598.31,911.69 3641.61,911.69 4393.39,911.69 4436.69,911.69 4480,911.69 4523.31,911.69 4566.61,911.69 5318.39,911.69 5361.69,911.69 5405,911.69 5448.31,911.69 5491.61,911.69 1618.39,955 1661.69,955 1705,955 1748.31,955 1791.61,955 2543.39,955 2586.69,955 2630,955 2673.31,955 2716.61,955 3468.39,955 3511.69,955 3555,955 3598.31,955 3641.61,955 4393.39,955 4436.69,955 4480,955 4523.31,955 4566.61,955 5318.39,955 5361.69,955 5405,955 5448.31,955 5491.61,955 1618.39,998.31 1661.69,998.31 1705,998.31 1748.31,998.31 1791.61,998.31 2543.39,998.31 2586.69,998.31 2630,998.31 2673.31,998.31 2716.61,998.31 3468.39,998.31 3511.69,998.31 3555,998.31 3598.31,998.31 3641.61,998.31 4393.39,998.31 4436.69,998.31 4480,998.31 4523.31,998.31 4566.61,998.31 5318.39,998.31 5361.69,998.31 5405,998.31 5448.31,998.31 5491.61,998.31 2614.8,3170.94 2658.11,3170.94 2701.42,3170.94 2614.8,3214.25 2658.11,3214.25 2701.42,3214.25 2614.8,3257.56 2658.11,3257.56 2701.42,3257.56 2614.8,3300.87 2658.11,3300.87 2701.42,3300.87 2614.8,3344.17 2658.11,3344.17 2701.42,3344.17
  other v4: 1445,325 2370,325 3295,325 4220,325 5145,325
GPIO0_EXP: EXP0.37 U5.7 | length 95.4
  Top Layer w8: v2(10900,2992.56) 10930,2992.56 10943.82,3006.38 U5.7@10989.65,3006.38
GPIO1_EXP: EXP0.38 U5.10
GPIO2_EXP: EXP0.39 U5.27
GPIO3_EXP: EXP0.40 U5.28
I2C_SCL: EXP0.13 U5.77 | length 2575.9
  Top Layer w8: EXP0.13@-215,6910 -170,6910 ; 496,1156 496,1467.21 ; 9683.79,2315 10895,2315 10920,2340 10965.95,2340 11049.08,2423.12 11049.08,2424.08 11139.25,2514.25 U5.77@11820.35,2514.25
I2C_SDA: EXP0.14 U5.91 | length 2832.4
  Top Layer w8: EXP0.14@-315,6910 -270,6955 -144.8,6955 ; 482,1161.8 482,1473.01 ; 9678.99,2330 10890.2,2330 10915.2,2355 10961.16,2355 11035.08,2428.92 11035.08,2429.88 11135.2,2530 11510,2530 11769.84,2789.84 U5.91@11820.35,2789.84
INPUT_GND: C58.1 C59.1 FB6.1 FB7.1 FB8.1 U6.2 U6.8 | length 625.4
  Top Layer w22: v4(9225,3095) FB6.1@9286.38,3095 ; v4(9245,3720) FB8.1@9306.38,3720 ; v4(9735,3160) FB7.1@9735,3216.38 ; v4@10080,3380 U6.2@10080,3224.88 10080,3126.85 C59.1@10081.85,3125 ; C58.1@10378.15,3125 10380,3126.85 U6.8@10380,3224.88 v4(10469.88,3224.88)
  other v4: 10080,3375
KRESET: "FET kRESET.1" EXP0.15 kRESET.1 | length 1717.7
  Top Layer w8: EXP0.15@-215,7010 -109.6,7010 53,7172.6 53,7483.8 ; 9674.2,2345 10670,2345 10695,2370 kRESET.1@10735,2370
MAX_ES: C2_EndstopChannel1.1 C2_EndstopChannel2.1 C2_EndstopChannel3.1 MAX1_EndstopChannel1.1 MAX1_EndstopChannel2.1 MAX1_EndstopChannel3.1 R3_EndstopChannel1.2 R3_EndstopChannel2.2 R3_EndstopChannel3.2 | length 698.7
  Top Layer w10: MAX1_EndstopChannel2.1@670,340 670,310 689.06,290.94 R3_EndstopChannel2.2@865,290.94 ; MAX1_EndstopChannel3.1@670,840 670,810 689.06,790.94 R3_EndstopChannel3.2@865,790.94 ; MAX1_EndstopChannel1.1@670,1340 670,1310 689.06,1290.95 R3_EndstopChannel1.2@865,1290.95
MAX_ES1: U5.24 | length 213.5
  Top Layer w8: U5.24@10989.65,2671.73 11088.27,2671.73 11120,2640 v2(11190,2640)
MAX_ES2: U5.22 | length 224.1
  Top Layer w8: U5.22@10989.65,2711.1 11133.9,2711.1 11155,2690 v2(11205,2690)
MAX_ES3: U5.4 | length 150.5
  Top Layer w8: U5.4@10989.65,3065.43 11105.43,3065.43 v2(11130,3090)
MIN_ES: C1_EndstopChannel1.1 C1_EndstopChannel2.1 C1_EndstopChannel3.1 MIN1_EndstopChannel1.1 MIN1_EndstopChannel2.1 MIN1_EndstopChannel3.1 R2_EndstopChannel1.2 R2_EndstopChannel2.2 R2_EndstopChannel3.2 | length 633
  Top Layer w10: C1_EndstopChannel2.1@815,133.03 998.03,133.03 MIN1_EndstopChannel2.1@1010,145 ; C1_EndstopChannel3.1@815,593.03 958.03,593.03 MIN1_EndstopChannel3.1@1010,645 ; C1_EndstopChannel1.1@815,1093.03 958.03,1093.03 MIN1_EndstopChannel1.1@1010,1145
MIN_ES1: U5.25 | length 99.5
  Top Layer w8: U5.25@10989.65,2652.05 11057.95,2652.05 v2(11080,2630)
MIN_ES2: U5.23 | length 159.2
  Top Layer w8: U5.23@10989.65,2691.42 11118.58,2691.42 v2(11140,2670)
MIN_ES3: U5.6 | length 148.2
  Top Layer w8: U5.6@10989.65,3026.06 11036.06,3026.06 11055,3045 v2(11130,3045)
MISO: EXP0.12 R50.1 U4_ThermocoupleChannel1.7 U4_ThermocoupleChannel2.7 U5.68 | length 2474.1
  Top Layer w8: EXP0.12@-315,6810 -265,6860 -84.4,6860 ; U4_ThermocoupleChannel2.7@398.98,1055 U4_ThermocoupleChannel2.7@439.49,1055 ; U4_ThermocoupleChannel1.7@399.49,480 425,480 v2(450,455) ; v2(449.49,1030) 449.49,1045 U4_ThermocoupleChannel2.7@439.49,1055 ; 459.49,1106.83 459.49,1070 444.49,1055 U4_ThermocoupleChannel2.7@439.49,1055 ; 510,1034.4 510,1461.41 ; 9689.59,2301 10936,2301 v2(10950,2315) ; v2(11000,2235) 11098.06,2235 ; 11670.75,2285.75 U5.68@11670.75,2364.65
  Bottom Layer w8: v2(450,455) 460,465 460,495 450,505 ; v2(10950,2315) 11000,2265 v2(11000,2235)
MOD0E1: U5.117 | length 144
  Top Layer w8: U5.117@11592.01,3195.35 11592.01,3097.99 v2(11625,3065)
MOD0E2: U5.120 | length 121.6
  Top Layer w8: U5.120@11532.95,3195.35 11532.95,3112.05 v2(11560,3085)
MOD0E3: U5.122
MOD0E4: U5.124
MOD0E5: U5.127
MOD1E1: U5.40 | length 86.4
  Top Layer w8: v2(11105,2445) 11119.57,2430.43 U5.40@11119.57,2364.65
MOD1E2: U5.41 | length 126
  Top Layer w8: U5.41@11139.25,2364.65 11139.25,2419.25 11165,2445 v2(11165,2480)
MOD1E3: U5.48
  other v2: 11270,2595
MOD1E4: U5.54
MOD1E5: U5.58
MOD2E1: U5.67 | length 111.1
  Top Layer w8: v2(11625,2465) 11651.06,2438.94 U5.67@11651.06,2364.65
MOD2E2: U5.69 | length 135.9
  Top Layer w8: v2(11665,2490) 11665,2450 11690.43,2424.57 U5.69@11690.43,2364.65
MOD2E3: U5.74 | length 95.6
  Top Layer w8: v2(11735,2480) 11759.8,2455.2 U5.74@11820.35,2455.2
MOD2E4: U5.78 | length 99.6
  Top Layer w8: U5.78@11820.35,2533.94 11886.06,2533.94 v2(11910,2510)
MOD2E5: U5.84 | length 89.9
  Top Layer w8: v2(11740,2675) 11762.95,2652.05 U5.84@11820.35,2652.05
MODE0: U7_DriverChannelDRV88251.24 U7_DriverChannelDRV88252.24 U7_DriverChannelDRV88253.24 U7_DriverChannelDRV88254.24 U7_DriverChannelDRV88255.24 | length 1460.7
  Top Layer w8: 1575,1340 1575,1185 1641.02,1118.98 U7_DriverChannelDRV88251.24@1641.02,1067.2 ; 2500,1300 2500,1185 2566.02,1118.98 U7_DriverChannelDRV88252.24@2566.02,1067.2 ; 3425,1340 3425,1185 3491.02,1118.98 U7_DriverChannelDRV88253.24@3491.02,1067.2 ; 4350,1340 4350,1185 4416.02,1118.98 U7_DriverChannelDRV88254.24@4416.02,1067.2 ; 5275,1340 5275,1185 5341.02,1118.98 U7_DriverChannelDRV88255.24@5341.02,1067.2
MODE0_EXP1: EXP0.29 U5.62 | length 314.6
  Top Layer w8: EXP0.29@-215,7710 19.8,7710 ; U5.62@11552.64,2364.65 11552.64,2302.36 v2(11565,2290)
MODE0_EXP2: EXP0.30 U5.31 | length 874.1
  Top Layer w8: EXP0.30@-315,7710 -270,7755 45,7755 ; 10494.28,2534.28 10989.31,2534.28 U5.31@10989.65,2533.94
MODE1: U7_DriverChannelDRV88251.25 U7_DriverChannelDRV88252.25 U7_DriverChannelDRV88253.25 U7_DriverChannelDRV88254.25 U7_DriverChannelDRV88255.25 | length 1438.8
  Top Layer w8: 1560,1340 1560,1180 1615.43,1124.57 U7_DriverChannelDRV88251.25@1615.43,1067.2 ; 2485,1300 2485,1180 2540.43,1124.57 U7_DriverChannelDRV88252.25@2540.43,1067.2 ; 3410,1340 3410,1180 3465.43,1124.57 U7_DriverChannelDRV88253.25@3465.43,1067.2 ; 4335,1340 4335,1180 4390.43,1124.57 U7_DriverChannelDRV88254.25@4390.43,1067.2 ; 5260,1340 5260,1180 5315.43,1124.57 U7_DriverChannelDRV88255.25@5315.43,1067.2
MODE1_EXP1: EXP0.31 U5.70 | length 124.7
  Top Layer w8: 11710,2240 11710,2364.53 U5.70@11710.12,2364.65
MODE1_EXP2: EXP0.32 U5.35 | length 961.7
  Top Layer w8: EXP0.32@-315,7810 -270,7855 ; 10550,2720 10610,2780 10705,2780 10725,2800 10875,2800 v2(10895,2820) ; v2(10905,2420) 10915,2420 10950.2,2455.2 U5.35@10989.65,2455.2
  Bottom Layer w8: v2(10895,2820) 10895,2605 10915,2585 10915,2480 10905,2470 v2(10905,2420)
MODE2: U7_DriverChannelDRV88251.26 U7_DriverChannelDRV88252.26 U7_DriverChannelDRV88253.26 U7_DriverChannelDRV88254.26 U7_DriverChannelDRV88255.26 | length 1593.6
  Top Layer w8: 1475,1340 1475,1200 1515,1160 1560,1160 1589.84,1130.16 U7_DriverChannelDRV88251.26@1589.84,1067.2 ; 2400,1200 2440,1160 2485,1160 2514.84,1130.16 U7_DriverChannelDRV88252.26@2514.84,1067.2 ; 3325,1340 3325,1200 3365,1160 3410,1160 3439.84,1130.16 U7_DriverChannelDRV88253.26@3439.84,1067.2 ; 4250,1340 4250,1200 4290,1160 4335,1160 4364.84,1130.16 U7_DriverChannelDRV88254.26@4364.84,1067.2 ; 5175,1340 5175,1200 5215,1160 5260,1160 5289.84,1130.16 U7_DriverChannelDRV88255.26@5289.84,1067.2
MODE2_EXP1: EXP0.33 U5.73 | length 462.8
  Top Layer w8: EXP0.33@-215,7910 45,7910 ; U5.73@11820.35,2435.51 11850,2405.87 11850,2245
MODE2_EXP2: EXP0.34 U5.34 | length 1052.3
  Top Layer w8: EXP0.34@-315,7910 -265,7960 25,7960 ; v2(10730,2455) 10755,2430 10883.18,2430 10928.06,2474.88 U5.34@10989.65,2474.88
  Bottom Layer w8: 10540,2750 10570,2720 10570,2600 10640,2530 10690,2530 10730,2490 v2(10730,2455)
MOSI: EXP0.10 R53.1 U3.7 U5.42 | length 2148
  Top Layer w8: EXP0.10@-315,6710 -270,6755 -149.8,6755 ; 538,1022.8 538,1449.81 ; 9701.19,2273 11138,2273 11158.94,2293.94 U5.42@11158.94,2364.65
NetC13_2: C13.2 U3.6
NetC17_1: C17.1 C20.2 FB1.1 U10.14
NetC21_2: C21.2 FB1.2 U10.15
NetC22_1: C22.1 F4.1 U2.10 U2.11 U2.12 U2.13
NetC24_2: C24.2 U2.9
NetC43_2: C43.2 U5.141 X2.1 | length 330.2
  Top Layer w8: C43.2@10982.44,3460 10982.44,3362.56 X2.1@10995,3350 11010,3350 11119.57,3240.43 U5.141@11119.57,3195.35
NetC44_2: C44.2 U5.142 X2.2 | length 487.5
  Top Layer w8: X2.2@10845,3350 10845,3300 10870,3275 11065.2,3275 11099.88,3240.32 U5.142@11099.88,3195.35 ; X2.2@10845.39,3350 10845.39,3360.39 10852.56,3367.56 C44.2@10852.56,3460
NetC56_2: "Logic Source1.1" C56.2 U6.14 | length 206
  Top Layer w22: U6.14@10130,3585.12 10130,3655 10193.15,3718.15 C56.2@10193.15,3765
NetC57_2: C57.2 R16.2 U6.16 | length 178.9
  Top Layer w22: R16.2@9920,3684.53 9976.38,3684.53 C57.2@9976.85,3685 10030,3631.85 U6.16@10030,3585.12
NetC58_2: C58.2 C59.2 U6.1 U6.3 U6.4 U6.5 USB.1 | length 1110.4
  Top Layer w22: U6.3@10130,3224.88 U6.4@10180,3224.88 U6.5@10230,3224.88 10230,3125 ; C59.2@10188.15,3125 10230,3125 ; C58.2@10271.85,3125 10230,3125
  Top Layer w25: USB.1@9651,3350 9840,3350 9950.12,3239.88 U6.1@10030,3239.88 ; U6.1@10030,3224.88 10030,3080 10045,3065 10115,3065 10130,3080 U6.3@10130,3224.88
NetC66_DriverChannelDRV88251_2: C66_DriverChannelDRV88251.2 R30_DriverChannelDRV88251.2 U7_DriverChannelDRV88251.3 | length 266.8
  Top Layer w8: R30_DriverChannelDRV88251.2@1375,752.56 1452.56,752.56 1499,799 1570.92,799 1589.84,817.93 U7_DriverChannelDRV88251.3@1589.84,842.8
NetC66_DriverChannelDRV88252_2: C66_DriverChannelDRV88252.2 R30_DriverChannelDRV88252.2 U7_DriverChannelDRV88252.3 | length 266.8
  Top Layer w8: R30_DriverChannelDRV88252.2@2300,752.56 2377.56,752.56 2424,799 2495.92,799 2514.84,817.93 U7_DriverChannelDRV88252.3@2514.84,842.8
NetC66_DriverChannelDRV88253_2: C66_DriverChannelDRV88253.2 R30_DriverChannelDRV88253.2 U7_DriverChannelDRV88253.3 | length 266.8
  Top Layer w8: R30_DriverChannelDRV88253.2@3225,752.56 3302.56,752.56 3349,799 3420.92,799 3439.84,817.93 U7_DriverChannelDRV88253.3@3439.84,842.8
NetC66_DriverChannelDRV88254_2: C66_DriverChannelDRV88254.2 R30_DriverChannelDRV88254.2 U7_DriverChannelDRV88254.3 | length 266.8
  Top Layer w8: R30_DriverChannelDRV88254.2@4150,752.56 4227.56,752.56 4274,799 4345.92,799 4364.84,817.93 U7_DriverChannelDRV88254.3@4364.84,842.8
NetC66_DriverChannelDRV88255_2: C66_DriverChannelDRV88255.2 R30_DriverChannelDRV88255.2 U7_DriverChannelDRV88255.3 | length 266.8
  Top Layer w8: R30_DriverChannelDRV88255.2@5075,752.56 5152.56,752.56 5199,799 5270.92,799 5289.84,817.93 U7_DriverChannelDRV88255.3@5289.84,842.8
NetC68_DriverChannelDRV88251_1: C68_DriverChannelDRV88251.1 U7_DriverChannelDRV88251.1 | length 128.8
  Top Layer w8: C68_DriverChannelDRV88251.1@1427.56,800 1470.35,842.8 U7_DriverChannelDRV88251.1@1538.66,842.8
NetC68_DriverChannelDRV88251_2: C68_DriverChannelDRV88251.2 U7_DriverChannelDRV88251.2 | length 280.9
  Top Layer w8: C68_DriverChannelDRV88251.2@1372.44,800 1372.44,827.44 1385,840 1447.76,840 1464.56,856.8 1501.8,856.8 1531.26,886.26 1553.74,886.26 1564.25,875.75 U7_DriverChannelDRV88251.2@1564.25,842.8
NetC68_DriverChannelDRV88252_1: C68_DriverChannelDRV88252.1 U7_DriverChannelDRV88252.1 | length 128.8
  Top Layer w8: C68_DriverChannelDRV88252.1@2352.56,800 2395.35,842.8 U7_DriverChannelDRV88252.1@2463.66,842.8
NetC68_DriverChannelDRV88252_2: C68_DriverChannelDRV88252.2 U7_DriverChannelDRV88252.2 | length 280.9
  Top Layer w8: C68_DriverChannelDRV88252.2@2297.44,800 2297.44,827.44 2310,840 2372.76,840 2389.56,856.8 2426.8,856.8 2456.26,886.26 2478.74,886.26 2489.25,875.75 U7_DriverChannelDRV88252.2@2489.25,842.8
NetC68_DriverChannelDRV88253_1: C68_DriverChannelDRV88253.1 U7_DriverChannelDRV88253.1 | length 128.8
  Top Layer w8: C68_DriverChannelDRV88253.1@3277.56,800 3320.35,842.8 U7_DriverChannelDRV88253.1@3388.66,842.8
NetC68_DriverChannelDRV88253_2: C68_DriverChannelDRV88253.2 U7_DriverChannelDRV88253.2 | length 280.9
  Top Layer w8: C68_DriverChannelDRV88253.2@3222.44,800 3222.44,827.44 3235,840 3297.76,840 3314.56,856.8 3351.8,856.8 3381.26,886.26 3403.74,886.26 3414.25,875.75 U7_DriverChannelDRV88253.2@3414.25,842.8
NetC68_DriverChannelDRV88254_1: C68_DriverChannelDRV88254.1 U7_DriverChannelDRV88254.1 | length 128.8
  Top Layer w8: C68_DriverChannelDRV88254.1@4202.56,800 4245.35,842.8 U7_DriverChannelDRV88254.1@4313.66,842.8